# Altium PCB PCB1.PcbDoc
Units mm, origin at the board's own origin, x right, y up, seen from the top; angles counter-clockwise.
Board outline 107.25 x 132.75 mm, 4 copper layers (Top Layer, Ground, Power, Bottom Layer), stack 0.603 mm thick; 66 components, 47 nets, 259 pads, 46 vias.
Unrouted connection lines stored in the file: 3.
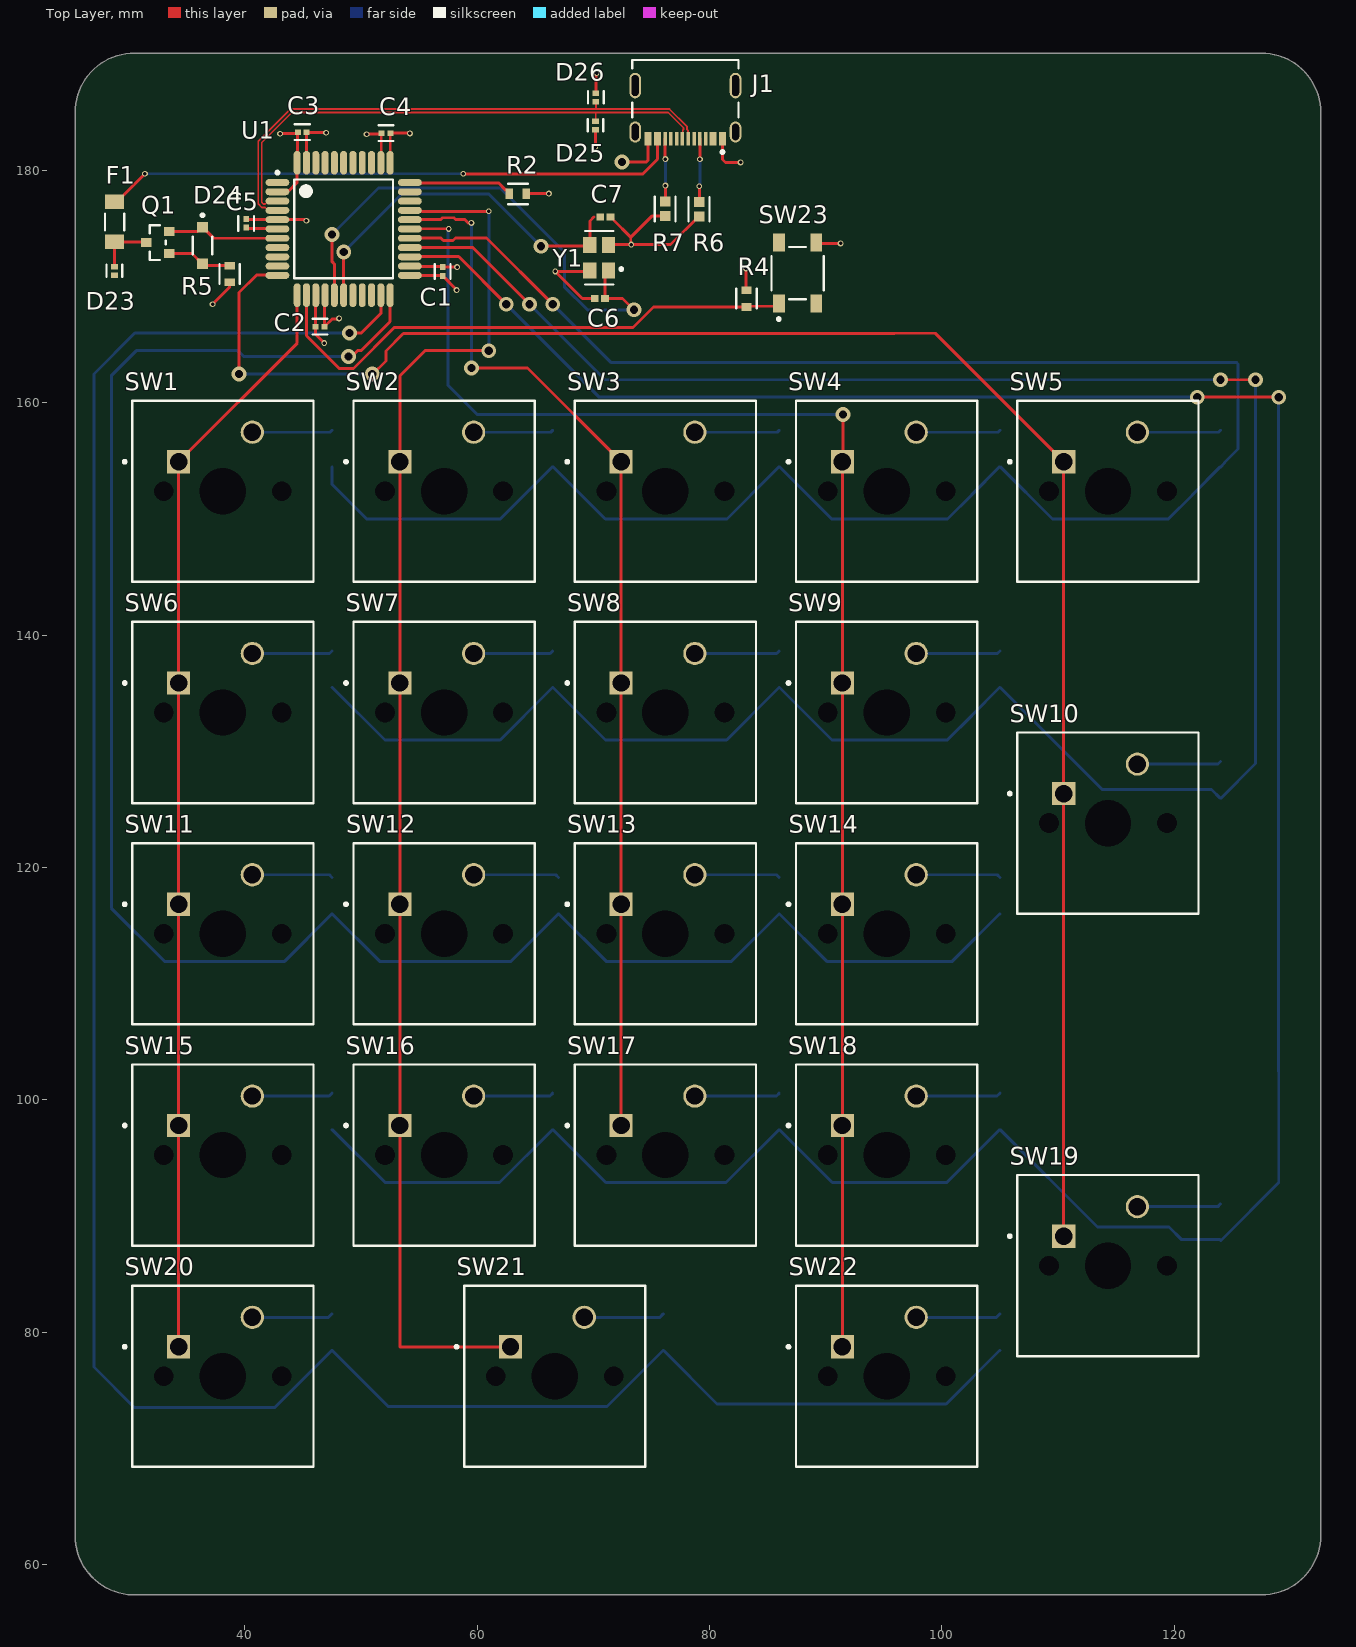
[diagram p0: Top Layer view]
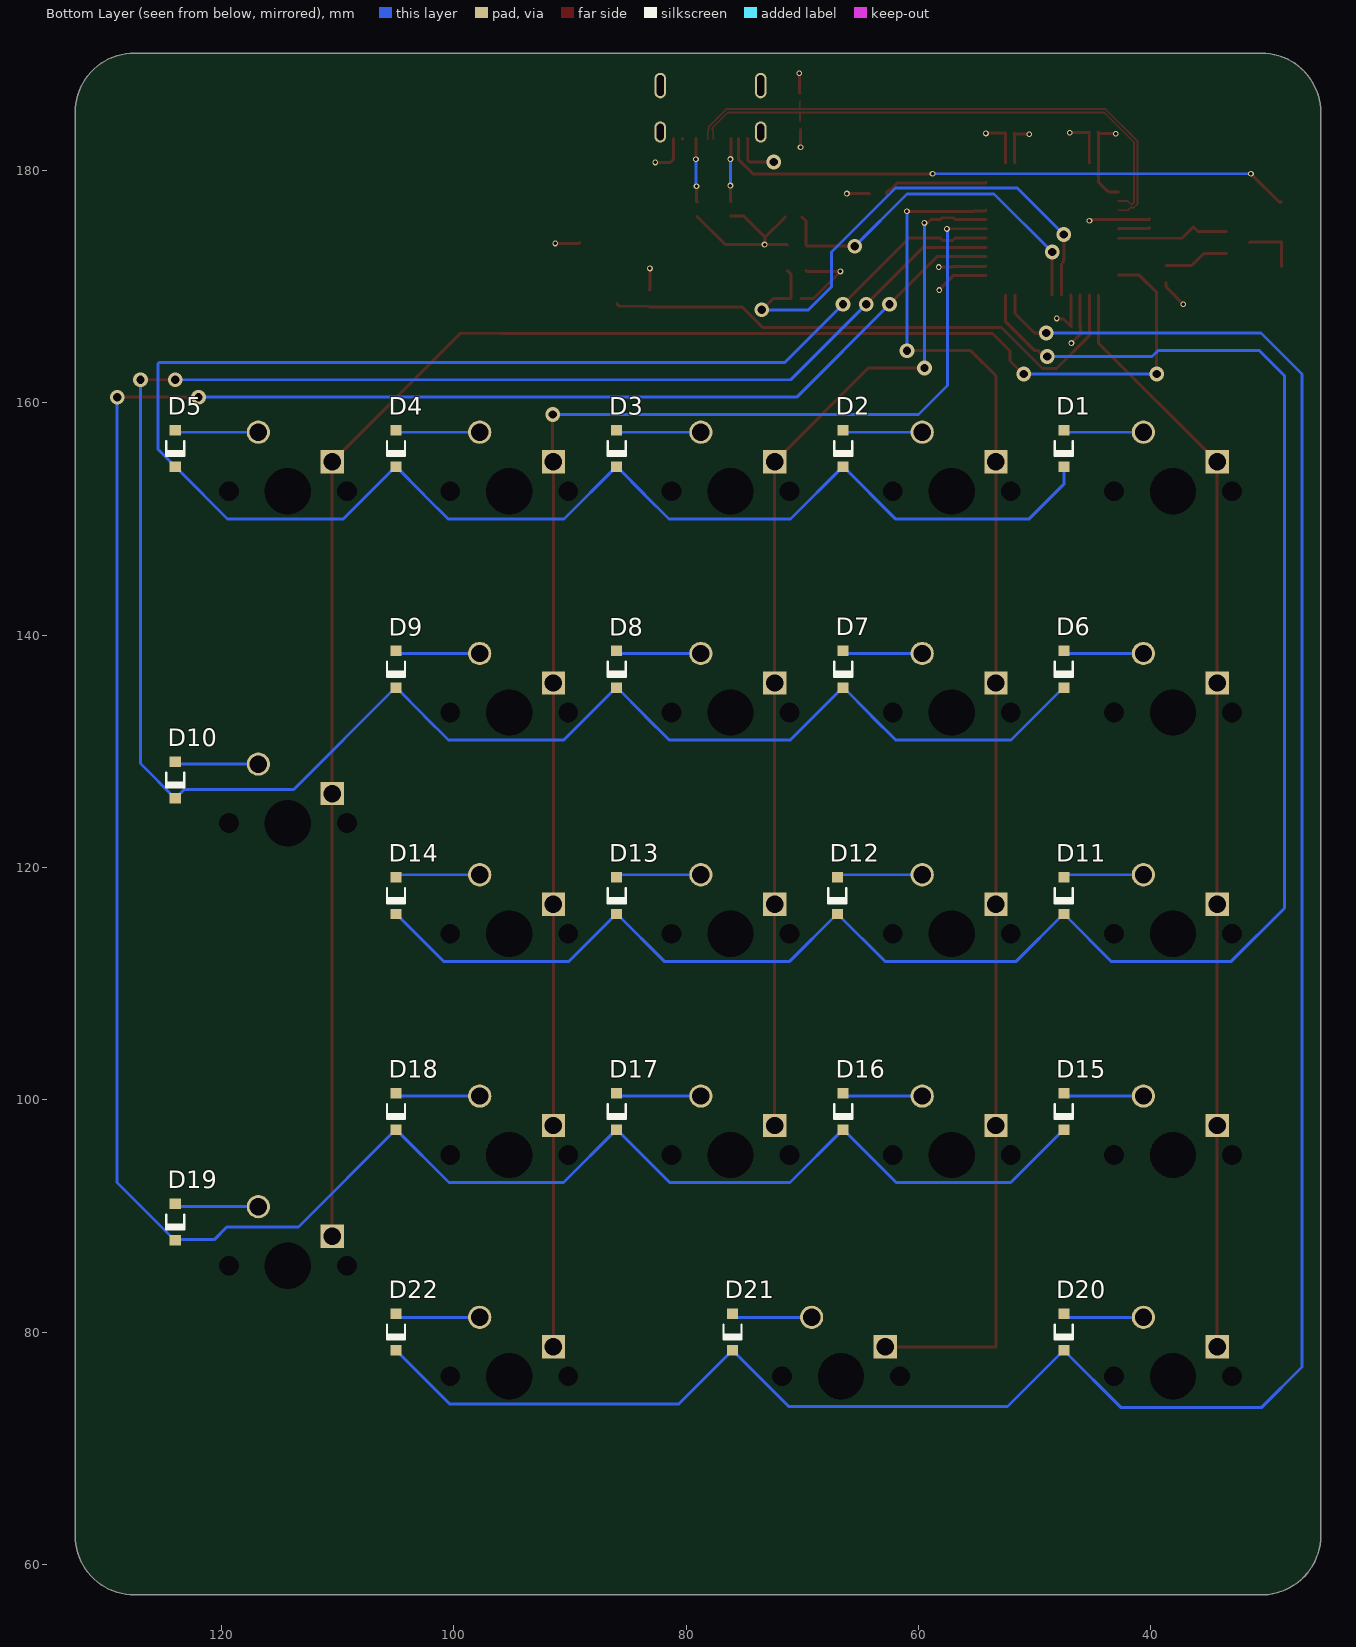
[diagram p1: Bottom Layer view, seen from below]
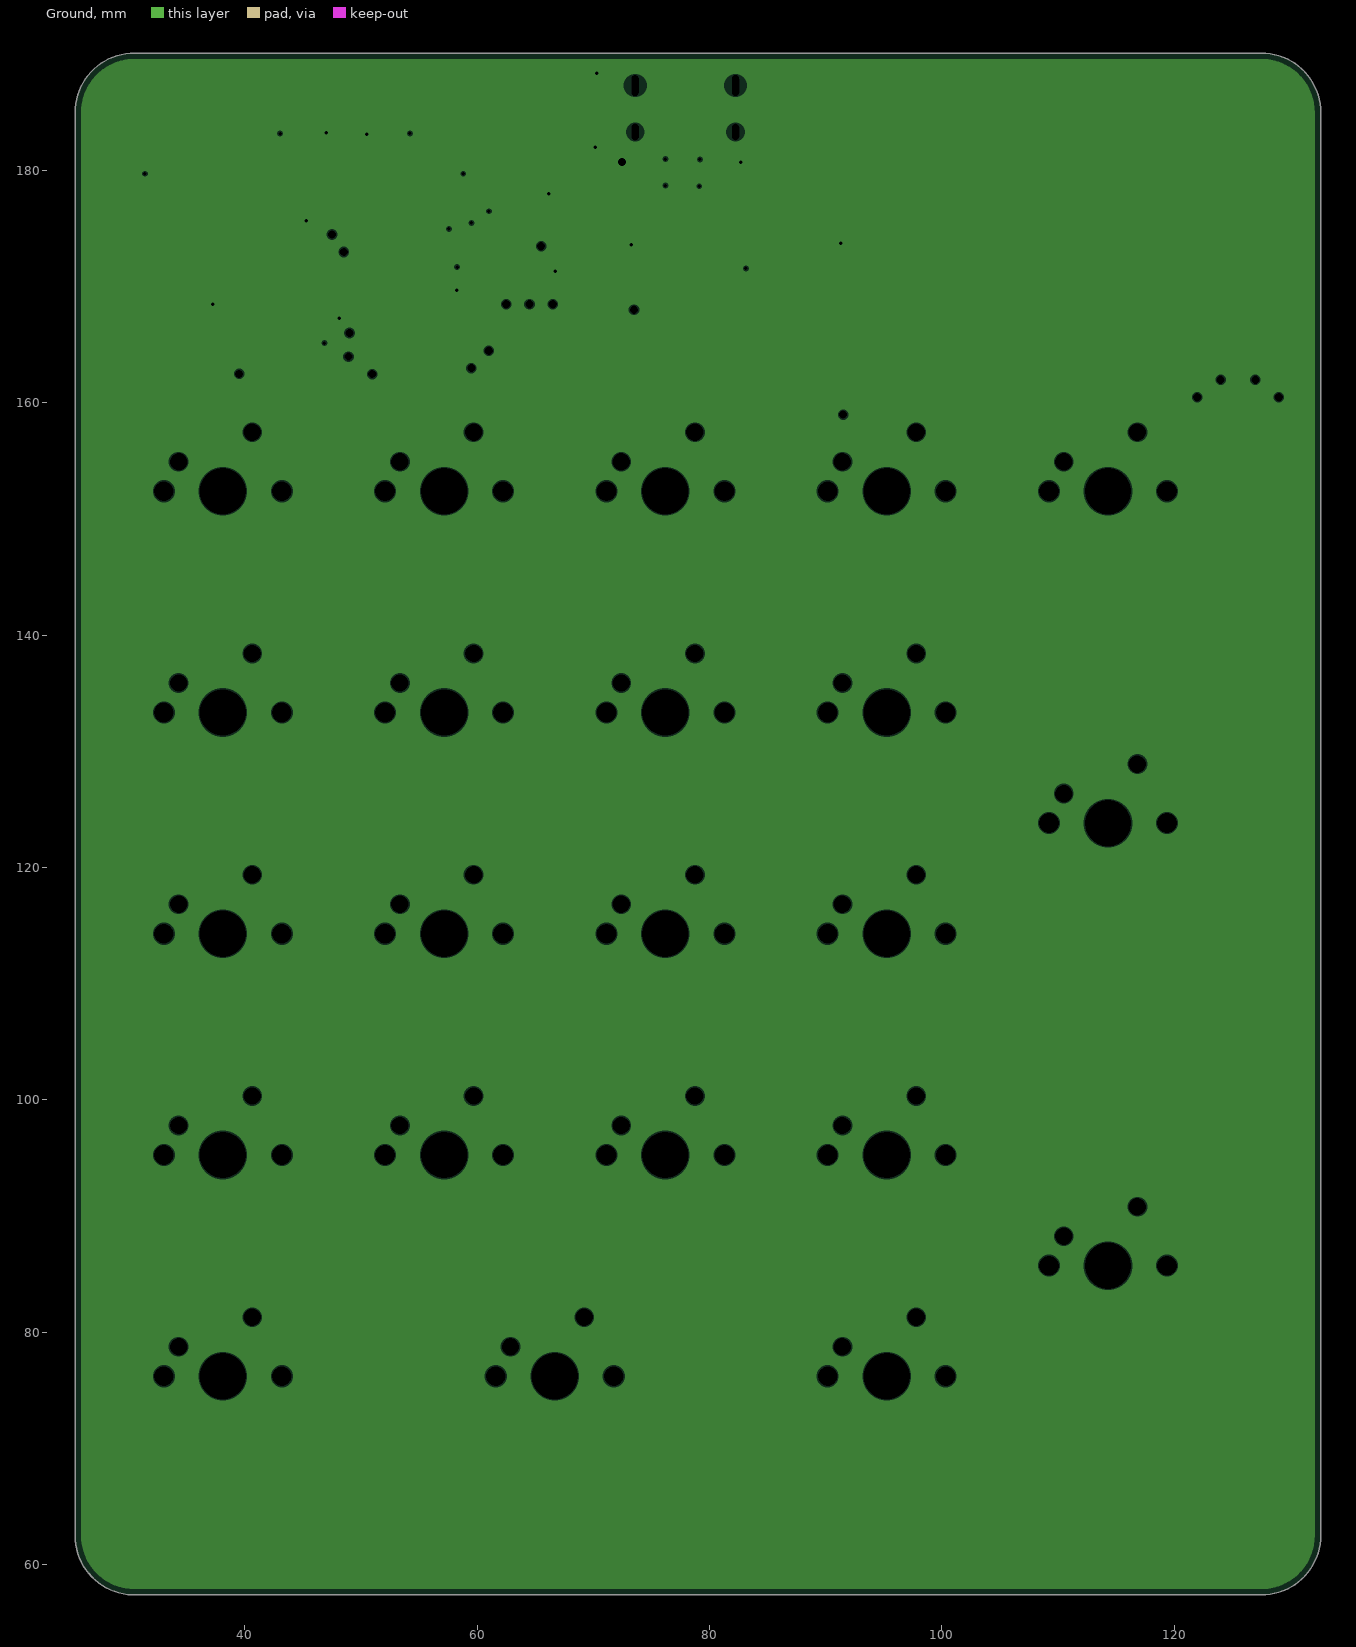
[diagram p2: Ground, clearances drawn from the general rule]
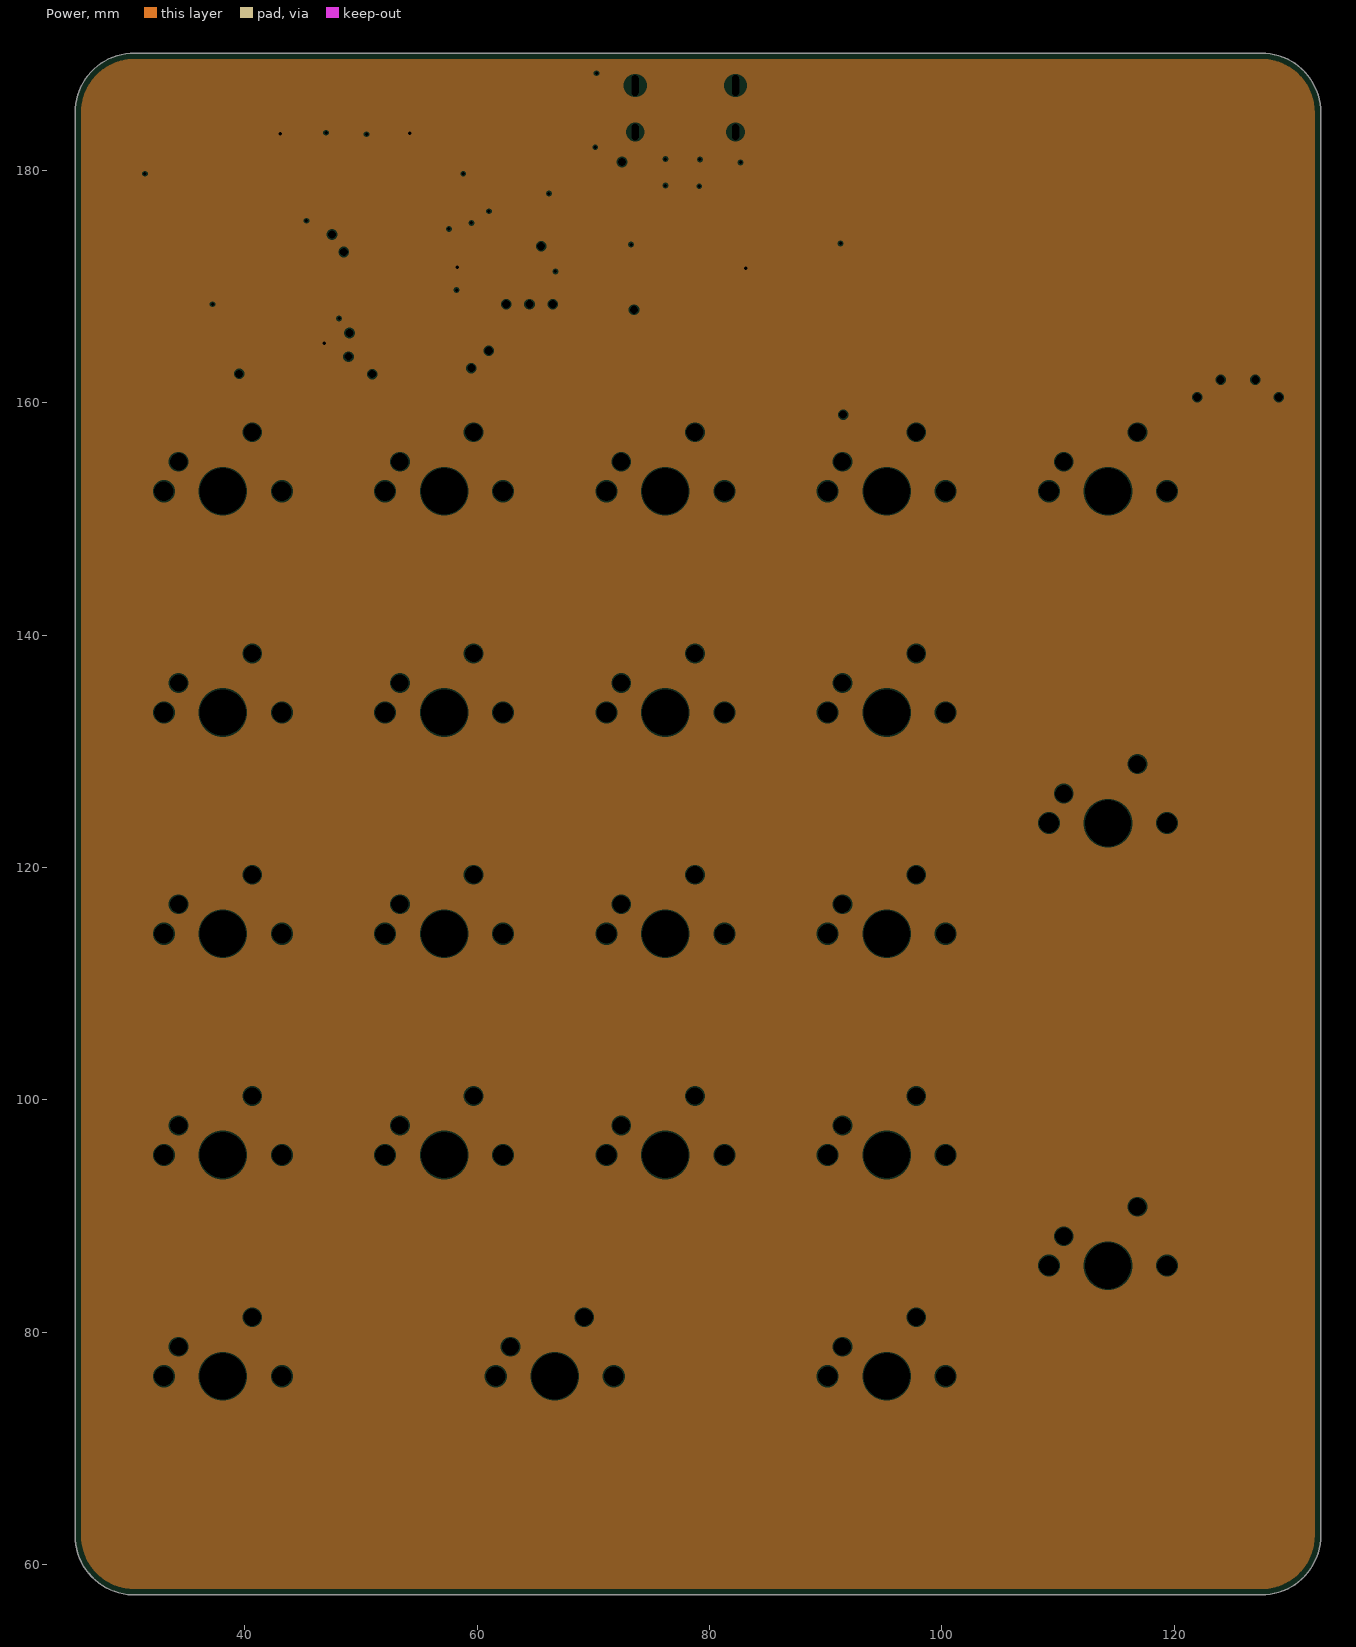
[diagram p3: Power, clearances drawn from the general rule]

## Layer stack, top to bottom
Top Solder: solder mask 0.0102, Solder Resist, Dk 3.5
Top Layer: signal copper 0.0356
Dielectric 2: prepreg 0.0711, PP-006, Dk 4.1
Ground: plane copper 0.035, net GND
Dielectric 1: dielectric 0.32, FR-4, Dk 4.8
Power: plane copper 0.035, net +5
Dielectric 3: prepreg 0.0711, PP-006, Dk 4.1
Bottom Layer: signal copper 0.0356
Bottom Solder: solder mask 0.0102, Solder Resist, Dk 3.5

## Board outline
29.914,57.406 cw(c30.5,62.5) 25.373,62.5 25.373,185 25.373,185.001 cw(c30.5,185) 30.5,190.127 127.5,190.127 127.501,190.127 cw(c127.5,185) 132.627,185 132.627,184.999 132.627,65 132.627,62.5 cw(c127.5,62.5) 127.5,57.373

## Design rules (kind name [scope] priority, off if disabled: settings)
BoardOutlineClearance [All] p1: gap=0.2 ignorepadtopadclearanceinfootprint=FALSE
Clearance [All] p1: gap=0.102 ignorepadtopadclearanceinfootprint=FALSE except(0.127: Arc-Via Track-Via SMDPad-Via THPad-Via Via-Via Via-Fill Via-Poly Via-Region Via-Text; 0.25: Arc-Hole Track-Hole SMDPad-Hole THPad-Hole Via-Hole Fill-Hole Poly-Hole Region-Hole Text-Hole)
ComponentClearance [All] p1: gap=0.102 collisioncheckmode=3 verticalgap=0.102 showdistances=TRUE
DiffPairsRouting [All] p1: maxlimit=0.102 minlimit=0.102 mostfreqgap=0.102 toplayer_minwidth=0.102 toplayer_maxwidth=1816.048 toplayer_prefwidth=0.102 bottomlayer_minwidth=0.102 bottomlayer_maxwidth=1816.048 bottomlayer_prefwidth=0.102 maxuncoupledlength=12.7
Height [All] p1: minheight=0 maxheight=1816.048 prefheight=12.7
HoleSize [All] p1: absolutevalues=TRUE maxlimit=6.3 minlimit=0.2 maxpercent=80.000 minpercent=20.000
HoleToHoleClearance [All] p1: gap=0.25 allowstackedmicrovias=FALSE
MinimumAnnularRing [All] p1: minimumring=0.076
MinimumSolderMaskSliver [All] p1: minsoldermaskwidth=0
PlaneClearance [All] p1: clearance=0.102
PlaneConnect PlaneConnectPowerPads [InPadClass('PowerPads')] p1: planeconnectstyle=Direct reliefexpansion=0.508 reliefentries=4 reliefconductorwidth=0.254 reliefairgap=0.254
PlaneConnect [All] p2: pad.planeconnectstyle=Relief pad.reliefexpansion=0.3 pad.reliefentries=4 pad.reliefconductorwidth=0.102 pad.reliefairgap=0.102 via.planeconnectstyle=Direct via.reliefexpansion=0.3 via.reliefentries=4 via.reliefconductorwidth=0.127 via.reliefairgap=0.127
PolygonConnect PolygonConnectPowerPads [All vs (InPadClass('PowerPads'))] p1: connectstyle=Direct reliefconductorwidth=0.254 reliefentries=4 polygonreliefangle="90 Angle" airgapwidth=0.254
PolygonConnect [All] p2: thpad.connectstyle=Relief thpad.reliefconductorwidth=0.102 thpad.reliefentries=4 thpad.polygonreliefangle="90 Angle" thpad.airgapwidth=0.102 smdpad.connectstyle=Relief smdpad.reliefconductorwidth=0.102 smdpad.reliefentries=4 smdpad.polygonreliefangle="90 Angle" smdpad.airgapwidth=0.102 via.connectstyle=Direct via.reliefconductorwidth=0.127 via.reliefentries=4 via.polygonreliefangle="90 Angle" via.airgapwidth=0.127
RoutingVias [All] p1: holewidth=0.2 width=0.45 viastyle="Through Hole" minholewidth=0.2 minwidth=0.45 maxholewidth=6.3 maxwidth=6.55
SilkToSilkClearance [All] p1: silktosilkclearance=0
SilkToSolderMaskClearance [IsPad] p1: minsilkscreentomaskgap=0.102 clearancetoexposedcopper=TRUE
SolderMaskExpansion [All] p1: expansion=0.075 istentingtop=FALSE
Width [All] p1: maxlimit=1816.048 minlimit=0.102 preferedwidth=0.102
20 further rules are at their usual default settings.

## Classes and differential pairs
differential pair D: +D_P -D_N

## Components (designator, comment, footprint, x,y, rotation, side; value= is the part's Value field where it differs from the comment)
C1 "0.1uF" FP-CL278-IPC_C 57.023,171.323 r270 top
C2 "0.1uF" FP-CL278-IPC_C 46.454,166.573 r0 top
C3 "0.1uF" FP-CL278-IPC_C 44.933,183.312 r0 top
C4 "0.1uF" FP-CL278-IPC_C 52.149,183.236 r180 top
C5 "1uF" FP-CL1016-IPC_C 40.107,175.466 r270 top
C6 "22pF" CAPC1005X55X25NL05T10 70.56,169 r0 top
C7 "22pF" CAPC1005X55X25NL05T10 71.041,176 r180 top
D1 "" DIOD-SOD123-2_V 47.5,156.075 r270 bottom
D2 "" DIOD-SOD123-2_V 66.5,156.075 r270 bottom
D3 "" DIOD-SOD123-2_V 86,156.075 r270 bottom
D4 "" DIOD-SOD123-2_V 105,156.075 r270 bottom
D5 "" DIOD-SOD123-2_V 124,156.075 r270 bottom
D6 "" DIOD-SOD123-2_V 47.5,137.075 r270 bottom
D7 "" DIOD-SOD123-2_V 66.5,137.075 r270 bottom
D8 "" DIOD-SOD123-2_V 86,137.075 r270 bottom
D9 "" DIOD-SOD123-2_V 105,137.075 r270 bottom
D10 "" DIOD-SOD123-2_V 124,127.55 r270 bottom
D11 "" DIOD-SOD123-2_V 47.5,117.575 r270 bottom
D12 "" DIOD-SOD123-2_V 67,117.575 r270 bottom
D13 "" DIOD-SOD123-2_V 86,117.575 r270 bottom
D14 "" DIOD-SOD123-2_V 105,117.575 r270 bottom
D15 "" DIOD-SOD123-2_V 47.5,99 r270 bottom
D16 "" DIOD-SOD123-2_V 66.5,99 r270 bottom
D17 "" DIOD-SOD123-2_V 86,99 r270 bottom
D18 "" DIOD-SOD123-2_V 105,99 r270 bottom
D19 "" DIOD-SOD123-2_V 124,89.475 r270 bottom
D20 "" DIOD-SOD123-2_V 47.5,80 r270 bottom
D21 "" DIOD-SOD123-2_V 76.025,80 r270 bottom
D22 "" DIOD-SOD123-2_V 105,80 r270 bottom
D23 "5.3V" FP-714AB-MFG 28.753,171.364 r270 top
D24 "5.1V" FP-SOD123-MFG 36.347,173.558 r270 top
D25 "5.3V" FP-714AB-MFG 70.18,183.896 r270 top
D26 "5.3V" FP-714AB-MFG 70.206,186.309 r90 top
F1 "500mA" FP-SF-1206S-MFG 28.778,175.59 r270 top value=596mΩ
J1 "217179-0001" FP-2171790001-MFG 77.918,186.178 r180 top
Q1 "PMOS" FP-SOT23-MFG 32.496,173.812 r180 top
R2 "1K" FP-RMCF0603-MFG 63.5,178 r0 top
R4 "10K" FP-RMCF0603-MFG 83.185,168.986 r90 top
R5 "1K" FP-RMCF0603-MFG 38.684,171.106 r90 top
R6 "5.1K" FP-RG1608-IPC_C 79.096,176.682 r270 top
R7 "5.1K" FP-RG1608-IPC_C 76.175,176.708 r270 top
SW1 "MX1A-11NW" CHRY-MX1A-11NW_V 38.1,152.4 r0 top
SW2 "MX1A-11NW" CHRY-MX1A-11NW_V 57.15,152.4 r0 top
SW3 "MX1A-11NW" CHRY-MX1A-11NW_V 76.2,152.4 r0 top
SW4 "MX1A-11NW" CHRY-MX1A-11NW_V 95.25,152.4 r0 top
SW5 "MX1A-11NW" CHRY-MX1A-11NW_V 114.3,152.4 r0 top
SW6 "MX1A-11NW" CHRY-MX1A-11NW_V 38.1,133.35 r0 top
SW7 "MX1A-11NW" CHRY-MX1A-11NW_V 57.15,133.35 r0 top
SW8 "MX1A-11NW" CHRY-MX1A-11NW_V 76.2,133.35 r0 top
SW9 "MX1A-11NW" CHRY-MX1A-11NW_V 95.25,133.35 r0 top
SW10 "MX1A-11NW" CHRY-MX1A-11NW_V 114.3,123.825 r0 top
SW11 "MX1A-11NW" CHRY-MX1A-11NW_V 38.1,114.3 r0 top
SW12 "MX1A-11NW" CHRY-MX1A-11NW_V 57.15,114.3 r0 top
SW13 "MX1A-11NW" CHRY-MX1A-11NW_V 76.2,114.3 r0 top
SW14 "MX1A-11NW" CHRY-MX1A-11NW_V 95.25,114.3 r0 top
SW15 "MX1A-11NW" CHRY-MX1A-11NW_V 38.1,95.25 r0 top
SW16 "MX1A-11NW" CHRY-MX1A-11NW_V 57.15,95.25 r0 top
SW17 "MX1A-11NW" CHRY-MX1A-11NW_V 76.2,95.25 r0 top
SW18 "MX1A-11NW" CHRY-MX1A-11NW_V 95.25,95.25 r0 top
SW19 "MX1A-11NW" CHRY-MX1A-11NW_V 114.3,85.725 r0 top
SW20 "MX1A-11NW" CHRY-MX1A-11NW_V 38.1,76.2 r0 top
SW21 "MX1A-11NW" CHRY-MX1A-11NW_V 66.675,76.2 r0 top
SW22 "MX1A-11NW" CHRY-MX1A-11NW_V 95.25,76.2 r0 top
SW23 "SPST-NO" FP-PTS647SK38SMTR2LFS-MFG 87.579,171.171 r90 top
U1 "ATmega32U4-AU" 44ML_M 48.5,174.981 r0 top
Y1 "16MHz" FP-TSX-3225-MFG 70.5,172.5 r90 top

## Footprints (in the part's own frame and the unit in brackets; to place one, negate y for a bottom-side part, rotate by r counter-clockwise, add the part's x,y. Pads: shape width x height; smd on the part's side, far side on the other; paste and mask are expansions set on the pad)
44ML_M [mm] "Thin QFP, 44-Leads, Body 10x10mm, Pitch 0.8mm, IPC Low Density"
  oval 2.05x0.6 smd: 1(-5.7,4) 2(-5.7,3.2) 3(-5.7,2.4) 4(-5.7,1.6) 5(-5.7,0.8) 6(-5.7,0) 7(-5.7,-0.8) 8(-5.7,-1.6) 9(-5.7,-2.4) 10(-5.7,-3.2) 11(-5.7,-4) 23(5.7,-4) 24(5.7,-3.2) 25(5.7,-2.4) 26(5.7,-1.6) 27(5.7,-0.8) 28(5.7,0) 29(5.7,0.8) 30(5.7,1.6) 31(5.7,2.4) 32(5.7,3.2) 33(5.7,4)
  oval 0.6x2.05 smd: 12(-4,-5.7) 13(-3.2,-5.7) 14(-2.4,-5.7) 15(-1.6,-5.7) 16(-0.8,-5.7) 17(0,-5.7) 18(0.8,-5.7) 19(1.6,-5.7) 20(2.4,-5.7) 21(3.2,-5.7) 22(4,-5.7) 34(4,5.7) 35(3.2,5.7) 36(2.4,5.7) 37(1.6,5.7) 38(0.8,5.7) 39(0,5.7) 40(-0.8,5.7) 41(-1.6,5.7) 42(-2.4,5.7) 43(-3.2,5.7) 44(-4,5.7)
  silkscreen extent -5.82,-4.25 4.25,4.97, body extent -5,-5 5,5, height 1.2
CAPC1005X55X25NL05T10 [mm] "Chip Capacitor, 2-Leads, Body 1.00x0.50mm, IPC Medium Density"
  rect 0.66x0.62 smd: 1(-0.44,0) 2(0.44,0)
  body extent -0.53,-0.28 0.53,0.27, height 0.55
CHRY-MX1A-11NW_V [mm] "THD, 2-Leads, Body 15.6x15.6mm"
  rect 2x2 hole 1.499 paste-2539.97: 1(-3.81,2.54)
  round 2 hole 1.499 paste-2539.97: 2(2.54,5.08)
  round 0 hole 3.988 unplated paste-2539.97: MH1(0,0)
  round 0 hole 1.702 unplated paste-2539.97: MH2(-5.08,0) MH3(5.08,0)
  silkscreen extent -8.57,-7.8 7.8,7.8, body extent -7.8,-7.8 7.8,7.8, height 15.2
DIOD-SOD123-2_V [mm] "SOD123, 2-Leads, Body 2.7x1.55mm, Height 1.45mm"
  rect 0.9x0.95 smd: 1(-1.575,0) 2(1.575,0)
  silkscreen extent -0.64,-0.83 0.64,0.77, body extent -1.35,-0.77 1.35,0.77, height 1.45
FP-714AB-MFG [mm]
  rect 0.47x0.6 smd paste+0 mask+0: 1(-0.365,0) 2(0.365,0)
  silkscreen extent -0.53,-0.67 0.53,0.67, body extent -0.7,-0.43 0.7,0.43, height 0.25
FP-2171790001-MFG [mm]
  rrect100% 1x1.8 hole 1.4 slot 0.6 at 0 deg paste-2539.97 mask+0: 1(-4.32,2.85) 2(4.32,2.85)
  rrect100% 1x2.2 hole 1.8 slot 0.6 at 0 deg paste-2539.97 mask+0: 3(-4.32,-1.15) 4(4.32,-1.15)
  rect 0.6x1.15 smd paste+0 mask+0: A1-B12(-3.2,3.425) A4-B9(-2.4,3.425) B1-A12(3.2,3.425) B4-A9(2.4,3.425)
  rect 0.3x1.15 smd paste+0 mask+0: A5(-1.25,3.425) A6(-0.25,3.425) A7(0.25,3.425) A8(1.25,3.425) B5(1.75,3.425) B6(0.75,3.425) B7(-0.75,3.425) B8(-1.75,3.425)
  silkscreen extent -4.57,-3.35 4.57,4.7, body extent -4.92,-3.45 4.92,4.1, height 0.25
FP-CL278-IPC_C [mm]
  rect 0.515x0.472 smd paste+0 mask+0: 1(-0.379,0) 2(0.379,0)
  silkscreen extent -0.64,-0.67 0.64,0.67, body extent -0.74,-0.38 0.74,0.38, height 0.25
FP-CL1016-IPC_C [mm]
  rect 0.515x0.472 smd paste+0 mask+0: 1(-0.379,0) 2(0.379,0)
  silkscreen extent -0.64,-0.67 0.64,0.67, body extent -0.74,-0.38 0.74,0.38, height 0.25
FP-PTS647SK38SMTR2LFS-MFG [mm]
  rect 1.55x1 smd paste+0 mask+0: 1(-2.625,1.6) 2(2.625,1.6) 3(-2.625,-1.6) 4(2.625,-1.6)
  silkscreen extent -4.07,-2.25 2.25,2.25, body extent -3.5,-2.35 3.5,2.35, height 0.25
FP-RG1608-IPC_C [mm]
  rect 0.855x0.906 smd paste+0 mask+0: 1(-0.626,0) 2(0.626,0)
  silkscreen extent -1.05,-0.9 1.05,0.9, body extent -1.15,-0.6 1.15,0.6, height 0.25
FP-RMCF0603-MFG [mm]
  rect 0.65x0.9 smd paste+0 mask+0: 1(-0.725,0) 2(0.725,0)
  silkscreen extent -0.85,-0.88 0.85,0.88, body extent -1.15,-0.58 1.15,0.58, height 0.25
FP-SF-1206S-MFG [mm]
  rect 1.25x1.65 smd paste+0 mask+0: 1(-1.725,0) 2(1.725,0)
  silkscreen extent -0.72,-0.82 0.72,0.82, body extent -2.45,-0.92 2.45,0.92, height 0.25
FP-SOD123-MFG [mm]
  rect 0.9x0.95 smd paste+0 mask+0: 1(-1.575,0) 2(1.575,0)
  silkscreen extent -2.72,-0.85 0.75,0.85, body extent -2.12,-0.95 2.12,0.95, height 0.25
FP-SOT23-MFG [mm]
  rect 0.9x0.8 smd paste+0 mask+0: 1(-1,0.95) 2(-1,-0.95) 3(1,0)
  silkscreen extent -0.7,-1.5 0.7,1.5, body extent -1.55,-1.6 1.55,1.6, height 0.25
FP-TSX-3225-MFG [mm]
  rect 1.4x1.15 smd paste+0 mask+0: 1(-1.1,-0.8) 2(1.1,-0.8) 3(1.1,0.8) 4(-1.1,0.8)
  silkscreen extent -2.3,-2.02 2.3,1.2, body extent -1.9,-1.48 1.9,1.48, height 0.25

## Part data
C1 C2 C3 C4: library part CMP-13271-000728-1, "Cap Ceramic 100nF 25V X5R ±10% SMD 0402 +85°C Paper T/R", Capacitance=100nF, Case Code (Imperial)=0402, Case Code (Metric)=1005, Dielectric=X5R, Max Operating Temperature=85°C, Min Operating Temperature=-55°C, Package Quantity=1, Tolerance=10%, Voltage=25V, Case/Package=0402, Depth=0.5mm, Height=0.5mm, Lead Free="Lead Free", Length=1mm, Mount="Surface Mount", Packaging="Tape and Reel", Radiation Hardening=No, Thickness=0.022inch, Voltage Rating=25V, Voltage Rating (DC)=25V, Width=0.02inch
C5: library part CMP-13271-001946-1, "Cap Ceramic 1uF 6.3V X5R ±10% SMD 0402 +85°C Paper T/R", Case Code (Imperial)=0402, Case Code (Metric)=1005, Dielectric=X5R, Max Operating Temperature=85°C, Min Operating Temperature=-55°C, Tolerance=10%, Voltage=6.3V, Capacitance=1uF, Case/Package=0402, Depth=0.5mm, Height=0.5mm, Lead Free="Lead Free", Length=1mm, Material=Ceramic, Mount="Surface Mount", Packaging="Tape and Reel", Radiation Hardening=No, Thickness=0.022inch, Voltage Rating=6.3V, Voltage Rating (DC)=6.3V, Width=0.02inch
C6 C7: library part CMP-2008-04302-1, Manufacturer=Murata, Part Number=GRM1555C1H220JA01D
D1 D2 D3 D4 D5 D6 D7 D8 D9 D10 D11 D12 D13 D14 D15 D16 D17 D18 D19 D20 D21 D22: library part CMP-2000-04932-2, "Fast Switching Diode, 100 V, 0.15 A, -65 to 150 degC, 2-Pin?SOD123, RoHS, Tape and Reel", If - Forward Current=0.15A, Ir - Reverse Current=1uA, Manufacturer=DiodesIncorporated, Max Surge Current=2A, Maximum Operating Temperature=+150C, Minimum Operating Temperature=-65C, Operating Temperature Range=-65Cto+150C, Package / Case=SOD-123, Package Reference=SOD123-2, Peak Reverse Voltage=100V, Vf - Forward Voltage=1.25V, Brand=DiodesIncorporated, Configuration=Single, Datasheet URL=http://www.farnell.com/datasheets/1915529.pdf, Datasheet Version="Rev. 24-2, 10/2013", Factory Pack Quantity=3000, Height=1.25mm, Length=2.85mm, Manufacturer URL=http://www.diodes.com/, Mounting Style=SMD/SMT, Package URL=http://www.diodes.com/datasheets/ds18004.pdf, Packaging=Reel, Product=SwitchingDiodes, Product Category=Diodes-GeneralPurpose,Power,Switching, Recovery Time=4ns, RoHS=True, Series=1N4148, Type=SwitchingDiode, Unit Weight=0.000353oz, Width=1.7mm
D23 D25 D26: library part CMP-00278-76731233-1, "ESD7571N2T5G Esd Protection Device, 5.3V, 0.3W, X2Dfn Rohs Compliant: Yes", Manufacturer Lifecycle Status=ACTIVE, Lifecycle Status=Production, NexarPartId=76731233, Number of Channels=1, RoHS=Compliant
D24: library part CMP-12792-000005-1, "DIODE ZENER 5.1V 500MW SOD123", Manufacturer=Diodes, Manufacturer Part Number=MMSZ5231B-7-F, Max Junction Temp=+150°C, Max Reverse Leakage Current=5uA, Max Zener Voltage=5.36V, Package=SOD123, Power Dissipation=370mW, Temperature="-65°C to +150°C", Temperature Range Low=-65°C, Automotive=No, Category=Diode, ComponentLink2Description=Datasheet, ComponentLink2URL=https://www.diodes.com/assets/Datasheets/ds18010.pdf, Device Class L1="Discrete Semiconductors", Device Class L2=Diodes, Device Class L3="Zener Diodes", Digikey Description="DIODE ZENER 5.1V 500MW SOD123", Footprint Url=https://www.diodes.com/assets/Package-Files/SOD123.pdf, Height=1.45mm, Lead Free=Yes, Mouser Description="Zener Diodes 5.1V 500mW", Nom Zener Voltage=5.1V, Octopart=https://octopart.com/mmsz5231b-7-f-diodes+inc.-55400050, RoHS=TRUE, Standoff Height=0mm, Temperature Range High=+150°C, Zener Impedance=17Ω
F1: library part CMP-07399-000002-1, "FUSE BOARD MNT 500MA 63VDC 1206", Fuse Current=0.5A, Fuse Interrupt Dc Current=50A, Manufacturer=Bourns, Manufacturer Part Number=SF-1206S050-2, Max Fuse Dc Voltage=63V, Package=SF-1206S, Resistance=596mΩ, Temperature="-20°C to +105°C", Temperature Range High=+105°C, Temperature Range Low=-20°C, Automotive=No, Category=Fuse, ComponentLink2Description=Datasheet, ComponentLink2URL=https://www.bourns.com/docs/product-datasheets/sf-1206s.pdf?sfvrsn=e6b376e3_33, Device Class L1="Circuit Protection", Device Class L2=Fuses, Device Class L3=unset, Digikey Description="FUSE BOARD MNT 500MA 63VDC 1206", Fuse Blow Speed=Slow, Fuse I2T=0.03A2Sec, Height=0.7mm, Ipc Land Pattern Name=CAPC310155X60, Lead Free=Yes, Mouser Description="Fuse Chip Slow Blow Acting 0.5A 63V SMD Solder Pad 1206 T/R UL", Octopart=https://octopart.com/sf-1206s050-2-bourns-8398336, RoHS=TRUE, Voltage Rating=63V
J1: library part CMP-04767-000028-2, "CONN RCP USB2.0 TYP C 24P SMD RA", Current Rating=1.25A, Max Operating Temperature=85°C, Min Operating Temperature=-40°C, Voltage Rating=30V, Contact Material="Gold, Nickel", Gender=Receptacle, Height=3.36mm, NexarPartId=117190526, Number of Contacts=16, USB Standard="USB 2.0"
Q1: library part CMP-12801-000021-1, "MOSFET P-CH 20V 4.2A SOT23", Continuous Drain Current=-4.2A, Drain To Source Breakdown Voltage=-20V, Drain To Source Resistance=40mΩ, Gate To Source Voltage=8V, Input Capacitace At Vds="808pF @ -15V", Manufacturer="Diodes Inc.", Manufacturer Part Number=DMG2305UX-13, Max Junction Temp=+150°C, Package=SOT23, Power Dissipation=1.4W, Pulse Drain Current=-15A, Temperature="-55°C to +150°C", Temperature Range Low=-55°C, Automotive=No, Category=Trans, ComponentLink2Description=Datasheet, ComponentLink2URL=https://www.diodes.com/assets/Datasheets/DMG2305UX.pdf, Depletion Mode=False, Device Class L1="Discrete Semiconductors", Device Class L2=Transistors, Device Class L3=MOSFETs, Digikey Description="MOSFET P-CH 20V 4.2A SOT23", Drain To Source Voltage=-20V, Footprint Url=https://www.diodes.com/assets/Package-Files/SOT23.pdf, Gate Charge At Vgs="10.2nC @ -4.5V", Height=1.1mm, Ipc Land Pattern Name=SOT92P240X102-3, Lead Free=Yes, Mouser Description="MOSFET P-Ch ENH FET -20V 52mOhm -5.0V", Number of Channels=1, Number Of P Channels=1, Octopart=https://octopart.com/dmg2305ux-13-diodes+inc.-29925594, RoHS=TRUE, Rthja Max=90°C/W, Standoff Height=0.013mm, Temperature Range High=+150°C, Threshold Vgs Max=-0.9V, Threshold Vgs Min=-0.5V, Turn Off Delay Time=79.3ns, Turn On Delay Time=10.8ns
R2 R5: library part CMP-26527-000152-1, "1kΩ ±1% 0.1W 0603 Thick Film Chip Resistor AEC-Q200 compliant", Case Code (Imperial)=0603, Case Code (Metric)=1608, Max Operating Temperature=155°C, Max Power Dissipation=100mW, Min Operating Temperature=-55°C, Resistance=1kR, Resistor Type="Thick Film", Temperature Coefficient=100ppm/°C, Tolerance=1%, Case/Package=0603, Construction=Rectangular, Contact Plating=Tin, Depth=0.8mm, Features="Automotive AEC-Q200", Height=0.022inch, Lead Free="Lead Free", Length=1.55mm, Military Standard=Not, Mount="Surface Mount", Number of Terminations=2, Packaging="Tape and Reel", Power Rating=100mW, Radiation Hardening=No, RoHS Compliant=Yes, Series=RMCF, Size Code=0603, Width=0.031inch
R4: library part CMP-2000-06990-2, "10kΩ ±1% 0.1W 0603 Thick Film Chip Resistor AEC-Q200 compliant", Case Code (Imperial)=0603, Case Code (Metric)=1608, Max Operating Temperature=155°C, Max Power Dissipation=100mW, Min Operating Temperature=-55°C, Resistance=10kR, Resistor Type="Thick Film", Temperature Coefficient=100ppm/°C, Tolerance=1%, Case/Package=0603, Construction=Rectangular, Contact Plating=Tin, Depth=0.8mm, Features="Automotive AEC-Q200", Height=0.022inch, Lead Free="Lead Free", Length=1.55mm, Military Standard=Not, Mount="Surface Mount", Number of Terminations=2, Packaging="Tape and Reel", Power Rating=100mW, Radiation Hardening=No, RoHS Compliant=Yes, Series=RMCF, Size Code=0603, Width=0.031inch
R6 R7: library part CMP-28537-003490-1, "Automotive Metal Thin Film Chip Resistor, 0603, 5.1kΩ, 0.1%, 25ppm/°C, 0.1W, 100V", Case Code (Imperial)=0603, Case Code (Metric)=1608, Max Operating Temperature=155°C, Max Power Dissipation=100mW, Min Operating Temperature=-55°C, Power Rating=62.5mW, Resistance=5.1kR, Temperature Coefficient=25ppm/°C, Tolerance=0.1%, Voltage Rating=75V, Case/Package=0603, Features="Automotive AEC-Q200", Height=0.4mm, Lead Free="Lead Free", Length=1.6mm, Number of Pins=2, Number of Terminations=2, Packaging="Tape and Reel", RoHS Compliant=Yes, Series=RG, Termination=SMD/SMT, Voltage Rating (DC)=75V, Width=0.8mm
SW1 SW2 SW3 SW4 SW5 SW6 SW7 SW8 SW9 SW10 SW11 SW12 SW13 SW14 SW15 SW16 SW17 SW18 SW19 SW20 SW21 SW22: library part CMP-2000-06786-1, "Keylock Switch, 12 V, -10 to 70 degC, 2-Pin THD, RoHS, Bulk", Actuator Color=N/A, Illumination Color=N/R, Manufacturer=Cherry, Maximum AC Voltage Rating=12V, Maximum Contact Resistance=200mOhm, Maximum Current Rating=0.01A, Minimum Insulation Resistance=100MOhm, Operating Force=0.58N, Operating Temperature=-10to70C, Package Description="2-Pin Through Hole Device, Body 15.6 x 15.6 mm", Part No=MX1A11NW, Actuator Length=3.6mm, Actuator Material=N/A, Actuator Style=Button, Body Orientation=Straight, Contact Material=Silver/Gold, Contact Plating=N/A, COO=UK, Datasheet URL=https://cdn.sparkfun.com/datasheets/Components/Switches/MX%20Series.pdf, Datasheet Version=09/2000, Dielectric Strength=N/A, Dimension=15.6x15.6x15.2mm, ECCN=EAR99, Electrical Life=50000000Cycle, Family=MX, Housing Material=N/A, HTS=8536509065, Illumination Type=N/R, IP Rating=N/A, Manufacturer URL=http://cherryswitches.com/cn/, Maximum DC Voltage Rating=12V, Maximum Power Rating=N/A, Mechanical Life=N/A, Mounting=ThroughHole, Mounting Technology=ThroughHole, Number of Terminals=2, Operating Speed=N/A, Package Reference=MX1A-11NW, Packaging=N/A, Pole Throw Configuration=SPST, RoHS=Unknown, Row Spacing=6.35mm, Supplier=CherryElectrical, Switch Configuration=N.O., Terminal Pitch=2.54mm, Terminal Type=PCPins, Total Travel=4.06mm, Type=DesktopProfile
SW23: library part CMP-10040-000033-1, "TACT 4.5 X 4.5, 3.8 MM H, 2.5N,", Max Operating Temperature=70°C, Min Operating Temperature=-20°C, Operating Force=250gf, Ratings=IP40, Actuator Type=Standard, Illumination Type=Non-Illuminated, Mechanical Life=100000Cycles, Mount="Surface Mount", Packaging="Tape and Reel", Switch Function=Off-Mom, Switch Travel=0.25mm, Termination="Gull Wing", Throw Configuration=SPST
U1: library part CMP-0095-00285-2, "8-bit AVR Microcontroller, 2.7-5.5V, 16MHz, 32KB Flash, 1KB EEPROM, 2.5KB SRAM, USB Controller, 44-pin TQFP, Industrial Grade (-40°C to 85°C), Ext Osc", ComponentLink1Description="Manufacturer URL", ComponentLink1URL=http://www.atmel.com/, ComponentLink2Description="ATmega16U4/32U4 Datasheet", ComponentLink2URL=http://www.atmel.com/dyn/resources/prod_documents/doc7766.pdf, ComponentLink3Description="ATmega16U4 ATmega32U4 Summary", ComponentLink3URL=http://www.atmel.com/dyn/resources/prod_documents/7766S.pdf, DatasheetVersion="revF, Nov-2010", PackageDescription="44-Pin Plastic Thin Quad Flat Pack, 10 x 10 x 1.0 mm Body, 0.8 mm Pitch (TQFP)", PackageReference=44ML, PackageVersion="rev.G, Jul-2007", RevisionNote="DatasheetVersion updated. URLs added."
Y1: library part CMP-36405-000014-1, "CRYSTAL 16.0000MHZ 9PF SMD", Case/Package=SMD/SMT, ESR (Equivalent Series Resistance)=60R, Frequency Stability=9ppm, Frequency Tolerance=10ppm, Load Capacitance=9pF, Max Operating Temperature=75°C, Min Operating Temperature=-20°C, Package Quantity=1000, Drive Level=200uW, Frequency=16MHz, Height=0.024inch, Lead Free="Lead Free", Length=0.126inch, Mount="Surface Mount", Packaging="Tape and Reel", RoHS Compliant=Yes, Series=TSX-3225, Termination=SMD/SMT, Tolerance=10ppm, Weight=0.000564oz, Width=0.098inch

## Via types
v1: diameter 0.5, hole 0.3, Top Layer to Bottom Layer, 27 vias
v2: diameter 1.27, hole 0.711, Top Layer to Bottom Layer, 19 vias

## Nets (pads, with @x,y where several pads share a name; then routed paths per layer and width w, separated by ;. In a path a pad name is that pad's centre, name@x,y a point inside that pad or via, vN(x,y) a via of type N, cw(c..) or ccw(c..) an arc to the next point about the centre after c; other vN are vias at no path point)
+5: C1.1 C2.1 C3.1 C4.1 R4.2 U1.2 U1.14 U1.24 U1.34 U1.44 | length 22.6
  Top Layer w0.254: U1.2 43.619,178.181 43.738,178.3 43.807,178.3 44.5,178.993 U1.44 44.527,180.708 C3.1@44.527,183.285 ; v1(43.028,183.185) 44.427,183.185 C3.1@44.527,183.285 ; C3.1 C3.1@44.527,183.285 ; U1.14 46.088,169.269 46.088,166.585 C2.1 46.076,165.913 v1(46.838,165.151) ; U1.34 52.514,180.695 52.514,183.222 C4.1 52.54,183.223 54.191,183.223 v1(54.204,183.21) ; U1.24@54.2,171.8 54.249,171.751 C1.1@57.023,171.751 ; C1.1 57.024,171.703 v1(58.268,171.704) v1(58.268,171.704) ; v1(83.134,171.577) 83.134,169.762 R4.2
"Col 0": SW1.1 SW6.1 SW11.1 SW15.1 SW20.1 U1.12 | length 94.8
  Top Layer w0.254: SW20.1 SW15.1 SW11.1 SW6.1 SW1.1 44.5,165.15 U1.12@44.5,169.3
"Col 1": SW2.1 SW7.1 SW12.1 SW16.1 SW21.1 U1.30 | length 120.5
  Top Layer w0.254: U1.30@54.2,176.6 54.266,176.534 55.213,176.534 55.247,176.5 v1(61,176.5) ; v2(61,164.5) 55.5,164.5 53.34,162.34 SW2.1 SW7.1 SW12.1 SW16.1 53.34,78.74 SW21.1
  Bottom Layer w0.254: v2(61,164.5) v1(61,176.5)
"Col 2": SW3.1 SW8.1 SW13.1 SW17.1 U1.29 | length 91.4
  Top Layer w0.254: U1.29@54.2,175.8 56.863,175.8 57.009,175.946 57.991,175.946 58.137,175.8 58.925,175.8 59.225,175.5 v1(59.5,175.5) ; v2(59.5,163) 64.33,163 SW3.1 SW8.1 SW13.1 SW17.1
  Bottom Layer w0.254: v2(59.5,163) v1(59.5,175.5)
"Col 3": SW4.1 SW9.1 SW14.1 SW18.1 SW22.1 U1.28 | length 132.2
  Top Layer w0.254: U1.28@54.2,175 57.537,175 v1(57.556,174.981) ; SW22.1 SW18.1 SW14.1 SW9.1 SW4.1 91.5,155 v2(91.5,159)
  Bottom Layer w0.254: v1@57.5,175 57.5,161.5 60,159 v2(91.5,159)
"Col 4": SW5.1 SW10.1 SW19.1 U1.11 | length 155.1
  Top Layer w0.254: v2(39.5,162.5) 39.5,169.5 41,171 U1.11@42.8,171 ; v2(50.952,162.484) 51.003,162.484 52.139,163.62 52.139,164.484 53.639,165.984 95.921,165.984 95.937,166 99.43,166 SW5.1 SW10.1 SW19.1
  Bottom Layer w0.254: v2(39.5,162.5) 39.508,162.492 50.944,162.492 v2(50.952,162.484)
D_N: D25.1 J1.A7 U1.3 | length 46.3
  Top Layer w0.15: U1.3 41.985,177.381 41.735,177.131 41.583,177.131 41.446,177.268 41.446,182.422 44.027,185.003 70.206,185.003 ; D25.1 70.206,184.286 70.206,185.003 ; J1.A7 77.689,182.774 77.689,183.464 77.768,183.543 77.768,183.668 76.432,185.003 70.206,185.003
D_P: D26.1 J1.A6 U1.4 | length 47.7
  Top Layer w0.15: U1.4 41.985,176.581 41.735,176.831 41.458,176.831 41.146,177.144 41.146,182.546 43.903,185.303 70.231,185.303 ; D26.1 70.231,185.919 70.231,185.303 ; J1.A6 78.147,182.774 78.147,183.464 78.068,183.543 78.068,183.792 76.557,185.303 70.231,185.303
GND: C1.2 C2.2 C3.2 C4.2 C5.1 C6.1 C7.1 D23.2 D25.2 D26.2 J1.A1-B12 J1.B1-A12 R2.2 R5.1 R6.2 R7.2 SW23.4 U1.5 U1.15 U1.23 U1.35 U1.43 Y1.2 Y1.4 | length 62.8
  Top Layer w0.254: v1(37.211,168.504) 38.684,169.977 R5.1 ; C5.1 40.138,175.813 42.769,175.813 U1.5 45.132,175.781 45.222,175.692 v1(45.288,175.692) ; U1.43 45.306,180.687 45.306,183.306 C3.2 45.337,183.286 46.965,183.286 v1(46.99,183.261) ; U1.15 46.866,169.248 46.866,166.607 C2.2 46.854,166.573 47.518,167.237 48.061,167.237 v1(48.108,167.284) ; v1(50.469,183.137) 51.672,183.137 C4.2@51.735,183.201 ; U1.35 51.735,180.716 C4.2@51.735,183.201 ; C4.2 C4.2@51.735,183.201 ; U1.23@54.2,171 54.228,170.972 C1.2@57.023,170.972 ; C1.2 58.218,169.749 v1(58.218,169.712) ; R2.2 64.254,178.029 v1(66.167,178.029) ; Y1.4 69.623,171.323 v1(66.726,171.323) 69.049,169 C6.1 ; v1(70.155,182.016) 70.168,182.029 70.168,183.518 D25.2 ; D26.2 70.244,186.712 70.244,188.354 v1(70.282,188.392) ; Y1.2 71.334,173.634 v1(73.254,173.634) ; C7.1 71.501,176 71.684,175.817 71.684,175.797 73.216,174.265 ; v2(72.466,180.746) 74.561,180.746 74.71,180.895 74.71,182.745 J1.B1-A12 ; R7.2 75.033,176.082 73.216,174.265 ; R6.2 79.07,176.057 76.648,173.634 v1(73.254,173.634) ; J1.A1-B12 81.118,180.959 81.367,180.711 v1(82.67,180.711) ; SW23.4 89.239,173.736 v1(91.288,173.736) ; 73.216,174.265 73.216,173.672 v1(73.254,173.634)
NetC5_2: C5.2 U1.6 | length 2.7
  Top Layer w0.254: C5.2 40.159,175.034 42.747,175.034 U1.6
NetC6_2: C6.2 U1.16 Y1.1 | length 44.5
  Top Layer w0.254: v2(47.5,174.5) 47.484,174.484 47.484,172.453 47.516,172.421 47.516,172.151 47.7,171.967 U1.16@47.7,169.3 ; Y1.1 71,171.1 C6.2 72.516,169 v2(73.5,168.016)
  Bottom Layer w0.254: v2(47.5,174.5) 51.508,178.508 61.992,178.508 67.5,173 67.5,170 69.484,168.016 v2(73.5,168.016)
NetC7_2: C7.2 U1.17 Y1.3 | length 31.4
  Top Layer w0.254: U1.17@48.5,169.3 v2(48.5,173) ; v2(65.5,173.5) 69.6,173.5 Y1.3 69.7,175.66 70.04,176 70.06,176
  Bottom Layer w0.254: v2(48.5,173) 53.5,178 61,178 v2(65.5,173.5)
NetD1_1: D1.1 SW1.2 | length 7
  Top Layer w0.254: SW1.2 SW1.2@40.66,157.5
  Bottom Layer w0.254: SW1.2 47.33,157.48 D1.1
NetD2_1: D2.1 SW2.2 | length 6.9
  Bottom Layer w0.254: SW2.2 66.33,157.48 D2.1
NetD3_1: D3.1 SW3.2 | length 7.3
  Bottom Layer w0.254: SW3.2 85.83,157.48 D3.1
NetD4_1: D4.1 SW4.2 | length 7.3
  Bottom Layer w0.254: SW4.2 104.83,157.48 D4.1
NetD5_1: D5.1 SW5.2 | length 7.2
  Bottom Layer w0.254: SW5.2 123.83,157.48 D5.1
NetD6_1: D6.1 SW6.2 | length 7
  Bottom Layer w0.254: SW6.2 47.28,138.43 D6.1
NetD7_1: D7.1 SW7.2 | length 6.9
  Bottom Layer w0.254: SW7.2 66.28,138.43 D7.1
NetD8_1: D8.1 SW8.2 | length 7.4
  Bottom Layer w0.254: SW8.2 85.78,138.43 D8.1
NetD9_1: D9.1 SW9.2 | length 7.3
  Bottom Layer w0.254: SW9.2 104.78,138.43 D9.1
NetD10_1: D10.1 SW10.2 | length 7.3
  Bottom Layer w0.254: SW10.2 123.78,128.905 D10.1
NetD11_1: D11.1 SW11.2 | length 7
  Bottom Layer w0.254: SW11.2 47.27,119.38 D11.1
NetD12_1: D12.1 SW12.2 | length 7.4
  Bottom Layer w0.254: SW12.2 66.77,119.38 D12.1
NetD13_1: D13.1 SW13.2 | length 7.4
  Bottom Layer w0.254: SW13.2 85.77,119.38 D13.1
NetD14_1: D14.1 SW14.2 | length 7.3
  Bottom Layer w0.254: SW14.2 104.77,119.38 D14.1
NetD15_1: D15.1 SW15.2 | length 7
  Bottom Layer w0.254: SW15.2 47.255,100.33 D15.1
NetD16_1: D16.1 SW16.2 | length 6.9
  Bottom Layer w0.254: SW16.2 66.255,100.33 D16.1
NetD17_1: D17.1 SW17.2 | length 7.4
  Bottom Layer w0.254: SW17.2 85.755,100.33 D17.1
NetD18_1: D18.1 SW18.2 | length 7.3
  Bottom Layer w0.254: SW18.2 104.755,100.33 D18.1
NetD19_1: D19.1 SW19.2 | length 7.3
  Bottom Layer w0.254: SW19.2 123.755,90.805 D19.1
NetD20_1: D20.1 SW20.2 | length 7
  Bottom Layer w0.254: SW20.2 47.205,81.28 D20.1
NetD21_1: D21.1 SW21.2 | length 6.9
  Bottom Layer w0.254: SW21.2 75.73,81.28 D21.1
NetD22_1: D22.1 SW22.2 | length 7.3
  Bottom Layer w0.254: SW22.2 104.705,81.28 D22.1
NetD23_1: D23.1 F1.2 Q1.3 | length 4.9
  Top Layer w0.254: D23.1 28.753,173.84 F1.2 31.443,173.865 Q1.3
NetD24_2: D24.2 Q1.1 R5.2 | length 5.6
  Top Layer w0.254: Q1.1 35.443,172.862 36.322,171.983 D24.2 36.5,171.831 R5.2
NetF1_1: F1.1 J1.A4-B9 J1.B4-A9 | length 50
  Top Layer w0.254: F1.1 28.978,177.315 v1(31.394,179.73) ; v1(58.796,179.735) 58.801,179.73 74.263,179.73 75.518,180.985 J1.B4-A9 ; J1.A4-B9 J1.A4-B9@80.329,182.742
  Bottom Layer w0.254: v1(31.394,179.73) 31.397,179.733 58.793,179.733 v1(58.796,179.735)
NetJ1_A5: J1.A5 R6.1 | length 5.5
  Top Layer w0.254: R6.1@79.045,177.308 R6.1@79.07,177.333 ; R6.1 79.121,177.333 v1(79.121,178.664) ; J1.A5 79.168,180.979 v1(79.172,180.975)
  Bottom Layer w0.254: v1(79.121,178.664) 79.172,178.714 v1(79.172,180.975)
NetJ1_B5: J1.B5 R7.1 | length 5.4
  Top Layer w0.254: J1.B5 76.168,181.033 v1(76.2,181) ; R7.1 76.168,177.34 76.2,177.372 v1(76.2,178.714)
  Bottom Layer w0.254: v1(76.2,178.714) v1(76.2,181)
NetR2_1: R2.1 U1.33 | length 9.1
  Top Layer w0.254: U1.33@54.2,179 54.248,178.952 61.823,178.952 62.452,178.323 62.577,178.323 62.775,178.125 R2.1
NetR4_1: R4.1 SW23.1 U1.13 | length 47.4
  Top Layer w0.254: U1.13 45.3,165.796 48.12,162.976 49.337,162.976 52.853,166.492 73.413,166.492 75.182,168.261 R4.1 ; R4.1@83.351,168.326 85.759,168.326 SW23.1
"Row 0": D1.2 D2.2 D3.2 D4.2 D5.2 U1.27 | length 177.8
  Top Layer w0.254: U1.27@54.2,174.2 56.863,174.2 57.079,173.984 57.921,173.984 58.137,174.2 60.8,174.2 v2(66.5,168.5)
  Bottom Layer w0.254: D1.2 47.5,153 50.475,150.025 62,150.025 66.475,154.5 D2.2 66.525,154.5 71.025,150 81.5,150 83.576,152.076 83.576,152.101 85.975,154.5 D3.2 86.025,154.5 90.525,150 100.5,150 102.576,152.076 102.576,152.101 104.975,154.5 D4.2 105.025,154.5 109.525,150 119.5,150 121.576,152.076 121.576,152.101 123.975,154.5 D5.2 124.025,154.5 124.348,154.823 124.348,154.873 125.5,156.025 125.5,163.351 125.351,163.5 71.5,163.5 v2(66.5,168.5)
"Row 1": D6.2 D7.2 D8.2 D9.2 D10.2 U1.26 | length 206.5
  Top Layer w0.254: U1.26@54.2,173.4 59.6,173.4 v2(64.5,168.5) ; v2(124,162) v2(127,162)
  Bottom Layer w0.254: D6.2 47.525,135.5 52.05,130.975 61.975,130.975 64.076,133.076 64.076,133.101 66.475,135.5 D7.2 66.525,135.5 71.05,130.975 81.475,130.975 83.576,133.076 83.576,133.101 85.975,135.5 D8.2 86.025,135.5 90.55,130.975 100.475,130.975 102.576,133.076 102.576,133.101 104.975,135.5 D9.2 105.025,135.5 113.804,126.721 123.229,126.721 123.975,125.975 D10.2 124.025,125.975 127,128.95 v2(127,162) ; v2(64.5,168.5) 71,162 v2(124,162)
"Row 2": D11.2 D12.2 D13.2 D14.2 U1.22 | length 164.7
  Top Layer w0.254: v2(48.916,163.992) 49.191,163.992 49.699,164.5 50,164.5 52.5,167 U1.22@52.5,169.3
  Bottom Layer w0.254: v2(48.916,163.992) 39.899,163.992 39.391,164.5 30.649,164.5 28.5,162.351 28.5,116.5 33.075,111.925 43.425,111.925 45.326,113.826 45.326,113.851 47.475,116 D11.2 47.525,116 51.6,111.925 62.9,111.925 66.975,116 D12.2 67.025,116 71.1,111.925 81.9,111.925 85.975,116 D13.2 86.025,116 90.1,111.925 100.9,111.925 104.975,116 D14.2
"Row 3": D15.2 D16.2 D17.2 D18.2 D19.2 U1.25 | length 246.3
  Top Layer w0.254: U1.25@54.2,172.6 58.4,172.6 v2(62.5,168.5) ; v2(122,160.5) v2(129,160.5)
  Bottom Layer w0.254: D15.2 47.525,97.425 52.075,92.875 61.925,92.875 66.475,97.425 D16.2 66.525,97.425 71.075,92.875 81.425,92.875 85.975,97.425 D17.2 86.025,97.425 90.575,92.875 100.425,92.875 104.975,97.425 D18.2 105.025,97.425 113.398,89.052 119.558,89.052 120.65,87.96 123.94,87.96 D19.2 124.025,87.9 129.007,92.882 129.007,102.443 129,102.45 v2(129,160.5) ; v2(62.5,168.5) 70.5,160.5 v2(122,160.5)
"Row 4": D20.2 D21.2 D22.2 U1.21 | length 203.2
  Top Layer w0.254: v2(49,166.024) 50.024,166.024 51.7,167.7 U1.21@51.7,169.3
  Bottom Layer w0.254: v2(49,166.024) 30.524,166.024 27,162.5 27,77 30.5,73.5 42.55,73.5 47.475,78.425 D20.2 47.525,78.425 52.341,73.609 71.184,73.609 76,78.425 D21.2 76.05,78.425 80.65,73.825 100.375,73.825 104.975,78.425 D22.2
VBus: D24.1 Q1.2 U1.7 | length 9.9
  Top Layer w0.254: Q1.2 35.951,174.762 36.322,175.133 D24.1 36.372,175.133 37.324,174.181 U1.7
pads on no net: J1.1 J1.2 J1.3 J1.4 J1.A8 J1.B6 J1.B7 J1.B8 SW1.MH1 SW1.MH2 SW1.MH3 SW2.MH1 SW2.MH2 SW2.MH3 SW3.MH1 SW3.MH2 SW3.MH3 SW4.MH1 SW4.MH2 SW4.MH3 SW5.MH1 SW5.MH2 SW5.MH3 SW6.MH1 SW6.MH2 SW6.MH3 SW7.MH1 SW7.MH2 SW7.MH3 SW8.MH1 SW8.MH2 SW8.MH3 SW9.MH1 SW9.MH2 SW9.MH3 SW10.MH1 SW10.MH2 SW10.MH3 SW11.MH1 SW11.MH2 SW11.MH3 SW12.MH1 SW12.MH2 SW12.MH3 SW13.MH1 SW13.MH2 SW13.MH3 SW14.MH1 SW14.MH2 SW14.MH3 SW15.MH1 SW15.MH2 SW15.MH3 SW16.MH1 SW16.MH2 SW16.MH3 SW17.MH1 SW17.MH2 SW17.MH3 SW18.MH1 SW18.MH2 SW18.MH3 SW19.MH1 SW19.MH2 SW19.MH3 SW20.MH1 SW20.MH2 SW20.MH3 SW21.MH1 SW21.MH2 SW21.MH3 SW22.MH1 SW22.MH2 SW22.MH3 SW23.2 SW23.3 U1.1 U1.8 U1.9 U1.10 U1.18 U1.19 U1.20 U1.31 U1.32 U1.36 U1.37 U1.38 U1.39 U1.40 U1.41 U1.42

## Polygon pours and split planes (outlines as drawn)
GND on Ground (split plane): 30.5,189.617 127.5,189.617 127.501,189.617 127.518,189.619 127.802,189.609 128.103,189.58 128.401,189.531 128.696,189.462 128.985,189.374 129.268,189.268 129.543,189.143 129.81,189 130.066,188.841 130.312,188.665 130.546,188.473 130.766,188.266 130.973,188.046 131.165,187.812 131.341,187.566 131.5,187.31 131.643,187.043 131.768,186.768 131.874,186.485 131.962,186.196 132.031,185.901 132.08,185.603 132.109,185.302 132.119,185.019 132.117,185.002 132.117,185.001 132.117,185 132.117,184.999 132.117,65 132.117,62.5 132.119,62.482 132.109,62.198 132.08,61.897 132.031,61.599 131.962,61.304 131.874,61.015 131.768,60.732 131.643,60.457 131.5,60.19 131.341,59.934 131.165,59.688 130.973,59.454 130.766,59.234 130.546,59.027 130.312,58.835 130.066,58.659 129.81,58.5 129.543,58.357 129.268,58.232 128.985,58.126 128.696,58.038 128.401,57.969 128.103,57.92 127.802,57.891 127.518,57.881 127.5,57.883 29.933,57.917 29.897,57.92 29.599,57.969 29.304,58.038 29.015,58.126 28.732,58.232 28.457,58.357 28.19,58.5 27.934,58.659 27.688,58.835 27.454,59.027 27.234,59.234 27.027,59.454 26.835,59.688 26.659,59.934 26.5,60.19 26.357,60.457 26.232,60.732 26.126,61.015 26.038,61.304 25.969,61.599 25.92,61.897 25.891,62.198 25.881,62.482 25.883,62.5 25.883,184.999 25.883,185 25.883,185.001 25.881,185.018 25.891,185.302 25.92,185.603 25.969,185.901 26.038,186.196 26.126,186.485 26.232,186.768 26.357,187.043 26.5,187.31 26.659,187.566 26.835,187.812 27.027,188.046 27.234,188.266 27.454,188.473 27.688,188.665 27.934,188.841 28.19,189 28.457,189.143 28.732,189.268 29.015,189.374 29.304,189.462 29.599,189.531 29.897,189.58 30.198,189.609 30.482,189.619
+5 on Power (split plane): 30.5,189.617 127.5,189.617 127.501,189.617 127.518,189.619 127.802,189.609 128.103,189.58 128.401,189.531 128.696,189.462 128.985,189.374 129.268,189.268 129.543,189.143 129.81,189 130.066,188.841 130.312,188.665 130.546,188.473 130.766,188.266 130.973,188.046 131.165,187.812 131.341,187.566 131.5,187.31 131.643,187.043 131.768,186.768 131.874,186.485 131.962,186.196 132.031,185.901 132.08,185.603 132.109,185.302 132.119,185.019 132.117,185.002 132.117,185.001 132.117,185 132.117,184.999 132.117,65 132.117,62.5 132.119,62.482 132.109,62.198 132.08,61.897 132.031,61.599 131.962,61.304 131.874,61.015 131.768,60.732 131.643,60.457 131.5,60.19 131.341,59.934 131.165,59.688 130.973,59.454 130.766,59.234 130.546,59.027 130.312,58.835 130.066,58.659 129.81,58.5 129.543,58.357 129.268,58.232 128.985,58.126 128.696,58.038 128.401,57.969 128.103,57.92 127.802,57.891 127.518,57.881 127.5,57.883 29.933,57.917 29.897,57.92 29.599,57.969 29.304,58.038 29.015,58.126 28.732,58.232 28.457,58.357 28.19,58.5 27.934,58.659 27.688,58.835 27.454,59.027 27.234,59.234 27.027,59.454 26.835,59.688 26.659,59.934 26.5,60.19 26.357,60.457 26.232,60.732 26.126,61.015 26.038,61.304 25.969,61.599 25.92,61.897 25.891,62.198 25.881,62.482 25.883,62.5 25.883,184.999 25.883,185 25.883,185.001 25.881,185.018 25.891,185.302 25.92,185.603 25.969,185.901 26.038,186.196 26.126,186.485 26.232,186.768 26.357,187.043 26.5,187.31 26.659,187.566 26.835,187.812 27.027,188.046 27.234,188.266 27.454,188.473 27.688,188.665 27.934,188.841 28.19,189 28.457,189.143 28.732,189.268 29.015,189.374 29.304,189.462 29.599,189.531 29.897,189.58 30.198,189.609 30.482,189.619